# EAGLE board main.orig (EAGLE 9.0.0)
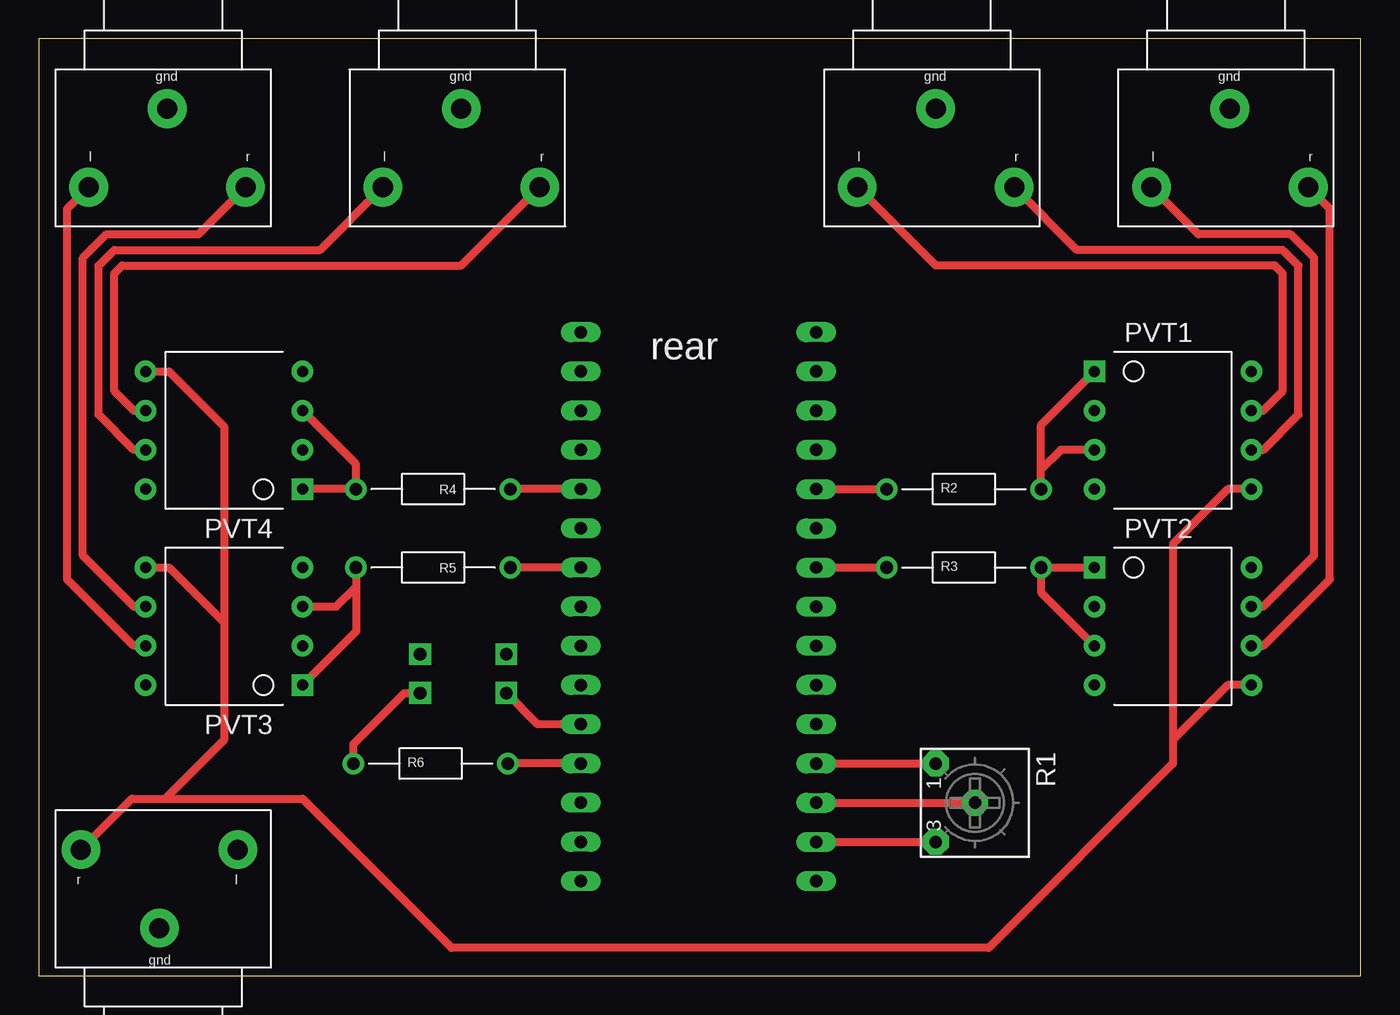
[diagram p0: board, top side]
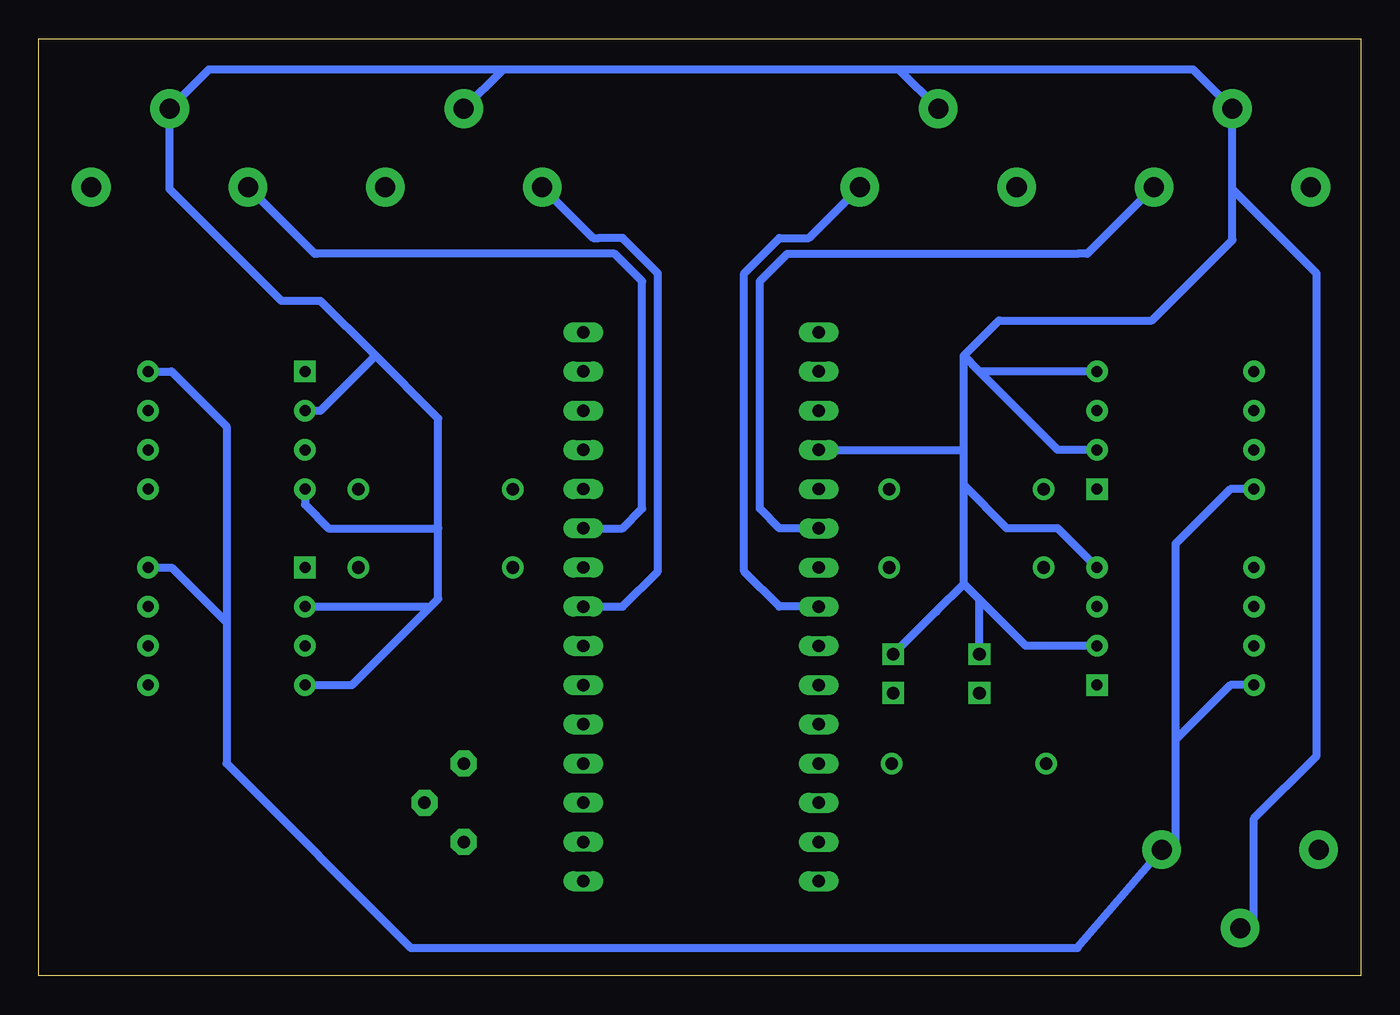
[diagram p1: board, bottom side, seen from below]

Size 85.65 x 60.73 mm. Coordinates in mm from the lower left corner, seen from the top.
Outline: 0,0 85.65,0 85.65,60.73 0,60.73 0,0
Copper layers (1*16): Top 0.035mm / dielectric 1.5mm / Bottom 0.035mm
Design rules "default": minimum track width 6mil, minimum drill 0.35mm, track to track 6mil, track to pad 6mil, pad to pad 6mil, via to via 6mil, smd to smd 6mil, copper to edge 40mil, drill to drill 6mil, minimum pad ring 10mil, minimum via ring 8mil, stop-mask expansion 4mil, vias tented up to drill 0mil, thermal gap 10mil

## Footprints (pad centres in the part's own frame; a part is rotated, then mirrored left to right if it is on the bottom)
MINIJACKF = drill 1.3 pad 2.5: GND 7.24,5.08; LEFT 2.16,0; RIGHT 12.32,0
DIP-8 = drill 0.711 pad 1.397 square: 1 -2.54,-5.08 | drill 0.711 pad 1.397: 2 0,-5.08; 3 2.54,-5.08; 4 5.08,-5.08; 5 5.08,5.08; 6 2.54,5.08; 7 0,5.08; 8 -2.54,5.08
3362H = drill 0.813 pad 1.676 octagon: 1 -2.54,-3.175; 2 0,-0.635; 3 2.54,-3.175
CF-25(C1-4) = drill 0.813 pad 1.397: P$1 0,0; P$2 10,0
NANO = drill 0.8 long: 3.3V -10.16,24.13; 5V -10.16,-1.27; A0 -10.16,19.05; A1 -10.16,16.51; A2 -10.16,13.97; A3 -10.16,11.43; A4 -10.16,8.89; A5 -10.16,6.35; A6 -10.16,3.81; A7 -10.16,1.27; AREF -10.16,21.59; D2 5.08,1.27; D3 5.08,3.81; D4 5.08,6.35; D5 5.08,8.89; D6 5.08,11.43; D7 5.08,13.97; D8 5.08,16.51; D9 5.08,19.05; D10 5.08,21.59; D11 5.08,24.13; D12 5.08,26.67; D13 -10.16,26.67; GND -10.16,-6.35; GND1 5.08,-1.27; RAW -10.16,-8.89; RST -10.16,-3.81; RST1 5.08,-3.81; RX1 5.08,-6.35; TX0 5.08,-8.89
2PIN = drill 0.813 pad 1.397 square: P$1 0,0; P$2 2.5,0

## Placement (x,y rotation side)
MJ1  MINIJACKF  [MINIJACKF]  69.92,51.1 0 top
MJ2  MINIJACKF  [MINIJACKF]  50.87,51.1 0 top
MJ3  MINIJACKF  [MINIJACKF]  1.09,51.1 0 top
MJ4  MINIJACKF  [MINIJACKF]  20.14,51.1 0 top
MJ5  MINIJACKF  [MINIJACKF]  15.06,8.18 180 top
PVT1  PVT322A  [DIP-8]  73.48,36.62 270 top
PVT2  PVT322A  [DIP-8]  73.48,23.92 270 top
PVT3  PVT322A  [DIP-8]  12.01,21.38 90 top
PVT4  PVT322A  [DIP-8]  12.01,34.08 90 top
R1  [3362H]  61.29,11.22 270 top
R2  CF-25(C1-4)  [CF-25(C1-4)]  54.94,31.54 0 top
R3  CF-25(C1-4)  [CF-25(C1-4)]  54.94,26.46 0 top
R4  CF-25(C1-4)  [CF-25(C1-4)]  30.55,31.54 180 top
R5  CF-25(C1-4)  [CF-25(C1-4)]  30.55,26.46 180 top
R6  CF-25(C1-4)  [CF-25(C1-4)]  20.39,13.76 0 top
U$1  NANO  [NANO]  40.2,32.81 180 top
U$2  2PINCONNECTOR  [2PIN]  30.3,18.34 90 top
U$3  2PINCONNECTOR  [2PIN]  24.71,18.34 90 top

## Library data of the parts
MJ1-MJ5 = MiniJack
PVT1-PVT4 = PVT322
R1 = bourns
R2-R6 U$2 U$3 = resistance
U$1 = Arduino-clone

## Nets
N$1: R1.3 U$1.3.3V
N$2: R1.2 U$1.AREF
N$3: R1.1 U$1.A0
N$4: MJ1.LEFT PVT2.7 U$1.A6
N$5: PVT2.1 PVT2.3 R3.P$2
N$6: PVT1.1 PVT1.3 R2.P$2
N$7: R2.P$1 U$1.A7
N$8: R3.P$1 U$1.A5
N$9: R5.P$1 U$1.D4
N$10: R4.P$1 U$1.D2
N$11: MJ2.RIGHT PVT1.6
N$12: PVT3.1 PVT3.3 R5.P$2
N$13: PVT4.1 PVT4.3 R4.P$2
N$14: U$1.D8 U$2.P$1
N$15: MJ2.LEFT PVT1.7 U$1.A4
N$17: R6.P$2 U$1.D9
N$18: MJ3.LEFT PVT3.7
N$19: MJ1.RIGHT PVT2.6
N$20: MJ4.RIGHT PVT4.6 U$1.D5
N$21: MJ4.LEFT PVT4.7
N$22: MJ3.RIGHT PVT3.6 U$1.D3
N$23: R6.P$1 U$3.P$1
N$24: MJ5.RIGHT PVT1.5 PVT2.5 PVT3.5 PVT4.5
N$25: MJ1.GND MJ2.GND MJ3.GND MJ4.GND MJ5.GND PVT1.2 PVT1.4 PVT2.2 PVT2.4 PVT3.2 PVT3.4 PVT4.2 PVT4.4 U$1.GND1 U$2.P$2 U$3.P$2
N$26: MJ5.LEFT PVT1.8 PVT2.8 PVT3.8 PVT4.8

## Tracks (layer width: path | path; a pad name or v marks a point on that pad's centre or on a via)
N$1
  Top 0.508: U$1.3.3V R1.3
N$2
  Top 0.508: U$1.AREF R1.2
N$3
  Top 0.508: U$1.A0 R1.1
N$4
  Top 0.508: PVT2.7 79.32,23.92 82.62,27.23 82.62,46.53 81.1,48.05 75.13,48.05 MJ1.LEFT
  Bottom 0.508: U$1.A6 47.82,29 46.55,30.27 46.55,45.01 48.33,46.78 67.64,46.78 67.76,46.78 MJ1.LEFT
N$5
  Top 0.508: PVT2.1 R3.P$2 64.94,24.85 PVT2.3
N$6
  Top 0.508: R2.P$2 64.94,32.81 | 64.94,32.81 64.94,35.7 PVT1.1 | PVT1.3 66.21,34.08 64.94,32.81
N$7
  Top 0.508: U$1.A7 R2.P$1
N$8
  Top 0.508: U$1.A5 R3.P$1
N$9
  Top 0.508: U$1.D4 R5.P$1
N$10
  Top 0.508: U$1.D2 R4.P$1
N$11
  Top 0.508: PVT1.6 79.32,34.08 81.61,36.37 81.61,46.02 80.59,47.04 67.26,47.04 MJ2.RIGHT
N$12
  Top 0.508: R5.P$2 20.55,25.19 | 20.55,25.19 20.55,22.31 PVT3.1 | PVT3.3 19.28,23.92 20.55,25.19
N$13
  Top 0.508: PVT4.1 R4.P$2 20.55,33.16 PVT4.3
N$14
  Top 0.508: U$2.P$1 32.33,16.3 U$1.D8
N$15
  Top 0.508: PVT1.7 79.32,36.62 80.59,37.89 80.59,45.51 80.08,46.02 58.11,46.02 MJ2.LEFT
  Bottom 0.508: U$1.A4 47.82,23.92 45.54,26.21 45.54,45.51 47.82,47.8 49.35,47.8 49.73,47.8 MJ2.LEFT
N$17
  Top 0.508: U$1.D9 R6.P$2
N$18
  Top 0.508: PVT3.7 6.17,21.38 1.85,25.7 1.85,49.7 MJ3.LEFT
N$19
  Top 0.508: MJ1.RIGHT 83.64,49.71 83.64,25.7 79.32,21.38 PVT2.6
N$20
  Top 0.508: PVT4.6 6.17,36.62 4.9,37.89 4.9,45.51 5.41,46.02 27.38,46.02 MJ4.RIGHT
  Bottom 0.508: U$1.D5 37.66,23.92 39.95,26.21 39.95,45.51 37.66,47.8 35.76,47.8 MJ4.RIGHT
N$21
  Top 0.508: PVT4.7 6.17,34.08 3.88,36.37 3.88,46.02 4.9,47.04 18.23,47.04 MJ4.LEFT
N$22
  Top 0.508: PVT3.6 6.17,23.92 2.87,27.23 2.87,46.53 4.39,48.05 10.36,48.05 MJ3.RIGHT
  Bottom 0.508: U$1.D3 37.66,29 38.93,30.27 38.93,45.01 37.16,46.78 18.36,46.78 17.73,46.78 MJ3.RIGHT
N$23
  Top 0.508: R6.P$1 20.39,15.03 23.69,18.34 U$3.P$1
N$24
  Top 0.508: MJ5.RIGHT 6.04,11.48 8.2,11.48 | PVT1.5 77.03,31.54 73.48,27.99 73.48,15.29 | 73.48,15.29 73.48,13.76 61.54,1.83 26.74,1.83 17.09,11.48 8.2,11.48 | PVT2.5 77.03,18.84 73.48,15.29 | PVT4.5 8.45,39.16 12.01,35.61 12.01,22.91 | PVT3.5 8.45,26.46 12.01,22.91 | 12.01,22.91 12.01,15.29 8.2,11.48
N$25
  Bottom 0.508: 29.92,58.72 10.87,58.72 MJ3.GND 8.33,50.98 | 29.92,58.72 55.57,58.72 | 55.57,58.72 74.62,58.72 MJ1.GND 77.16,50.98 69.92,43.74 67.38,43.74 63.95,40.31 | MJ2.GND 55.57,58.72 | MJ4.GND 29.92,58.72 | U$2.P$2 27.48,23.65 | 27.48,23.65 25.73,25.41 | 27.48,23.61 27.48,23.65 | 24.71,24.39 21.7,21.38 PVT3.2 | 24.71,24.39 25.73,25.41 | U$3.P$2 24.71,24.39 | 25.73,25.41 25.73,31.8 | PVT3.4 19.63,29 22.93,29 25.73,31.8 | PVT4.2 19.63,34.08 24.71,39.16 | 25.73,31.8 25.73,34.08 | 25.73,34.08 25.73,40.18 | 24.71,39.16 25.73,40.18 | PVT4.4 24.71,39.16 | MJ5.GND 6.93,3.1 6.93,10.21 2.87,14.27 2.87,45.51 8.33,50.98 | 25.73,40.18 23.44,42.47 13.53,42.47 8.33,47.67 8.33,50.98 | U$1.GND1 25.73,34.08 | PVT2.4 65.35,18.84 60.4,23.8 | 60.4,23.8 59.76,24.43 59.76,29 | PVT2.2 60.52,23.92 60.4,23.8 | PVT1.4 68.4,30.53 66.87,29 59.76,29 | 59.76,29 59.76,36.12 63.95,40.31 | PVT1.2 67.38,36.62 63.95,40.05 63.95,40.31
N$26
  Bottom 0.508: PVT3.8 8.45,18.84 12.01,15.29 | PVT4.8 8.45,31.54 12.01,27.99 12.01,15.29 | 12.01,15.29 12.01,8.18 MJ5.LEFT 18.36,1.83 61.54,1.83 73.48,13.76 73.48,22.91 | PVT1.8 77.03,39.16 73.48,35.61 73.48,22.91 | PVT2.8 77.03,26.46 73.48,22.91